# Altium PCB 智能车主板.PcbDoc
Units mm, origin at the board's own origin, x right, y up, seen from the top; angles counter-clockwise.
Board outline 100 x 80 mm, 4 copper layers (TOP01, GND02, PWR03, BOTTOM04), stack 0.603 mm thick; 92 components, 73 nets, 361 pads, 149 vias.
Unrouted connection lines stored in the file: 2.
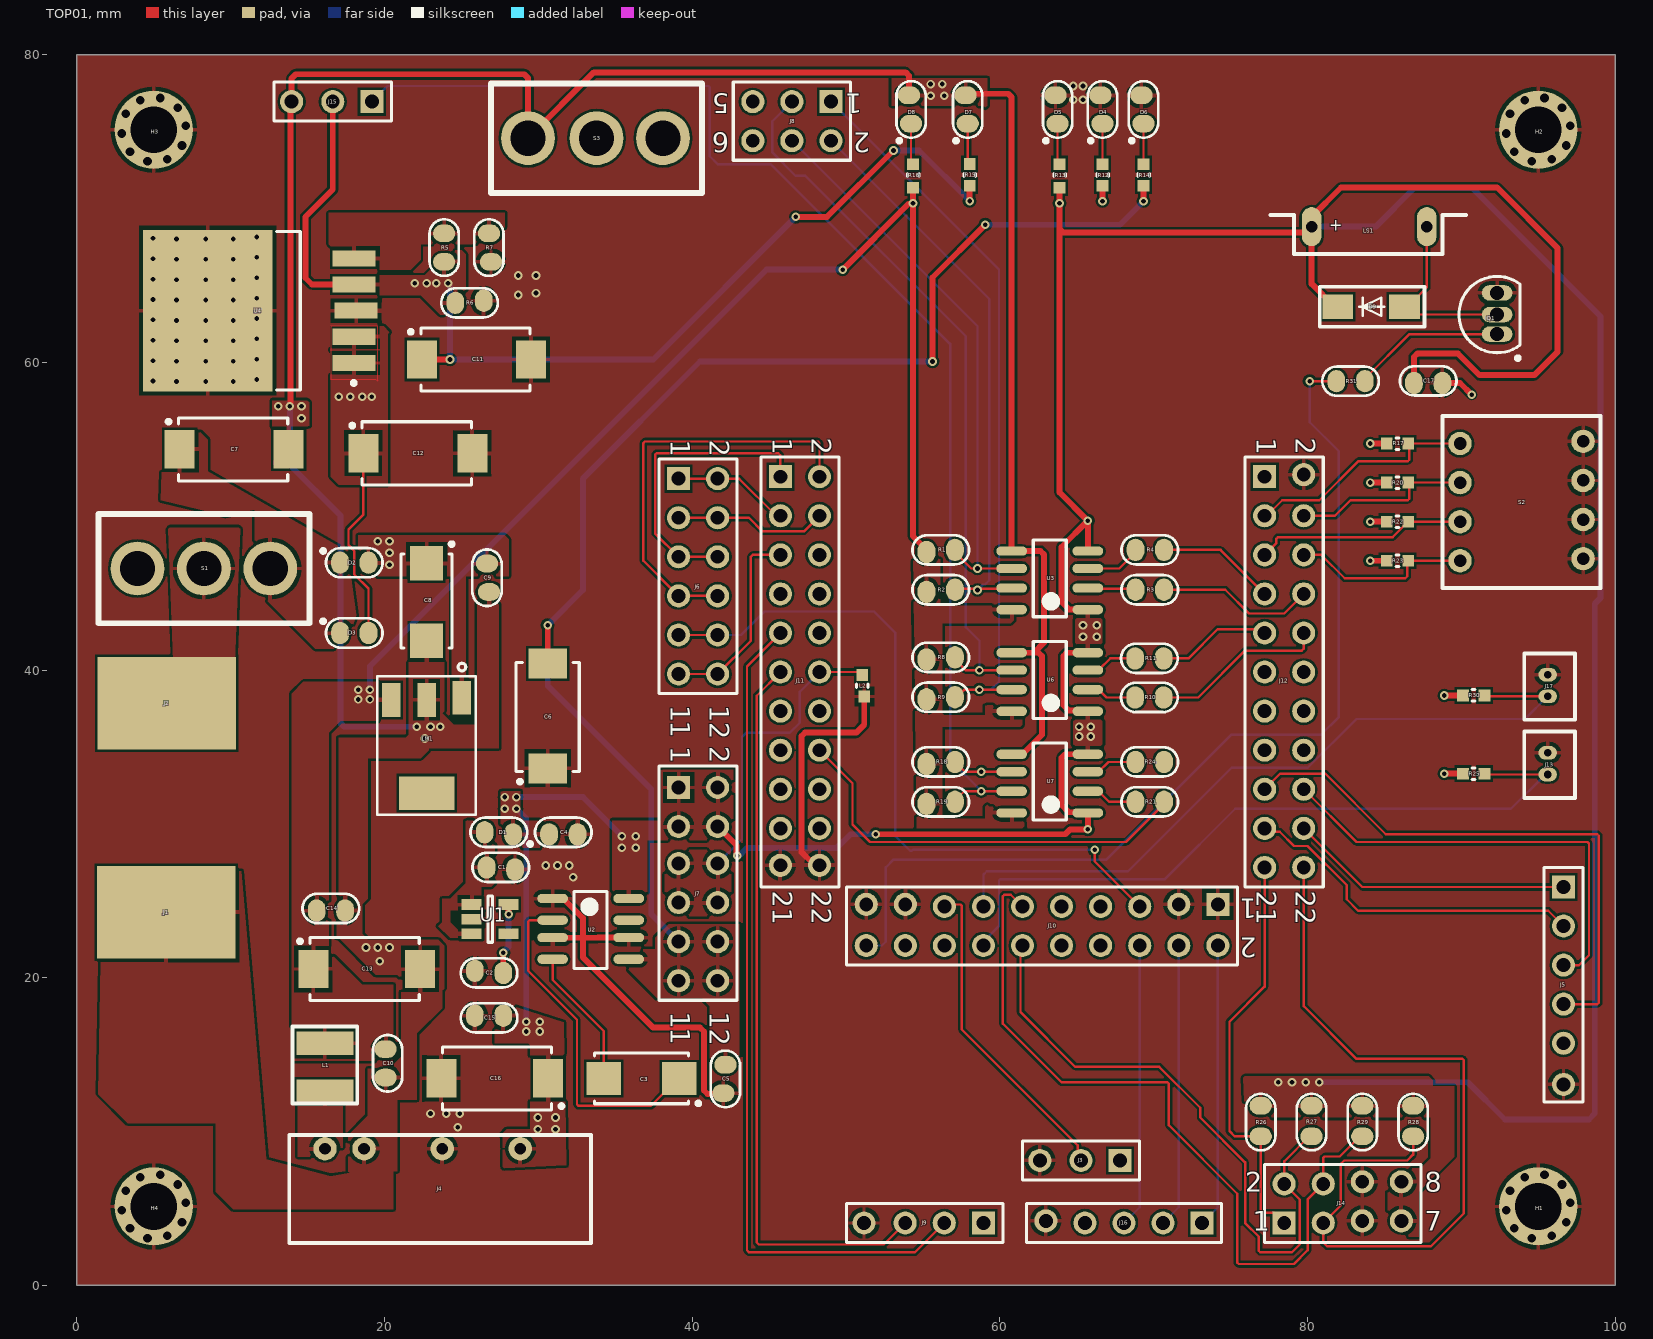
[diagram p0: TOP01 view]
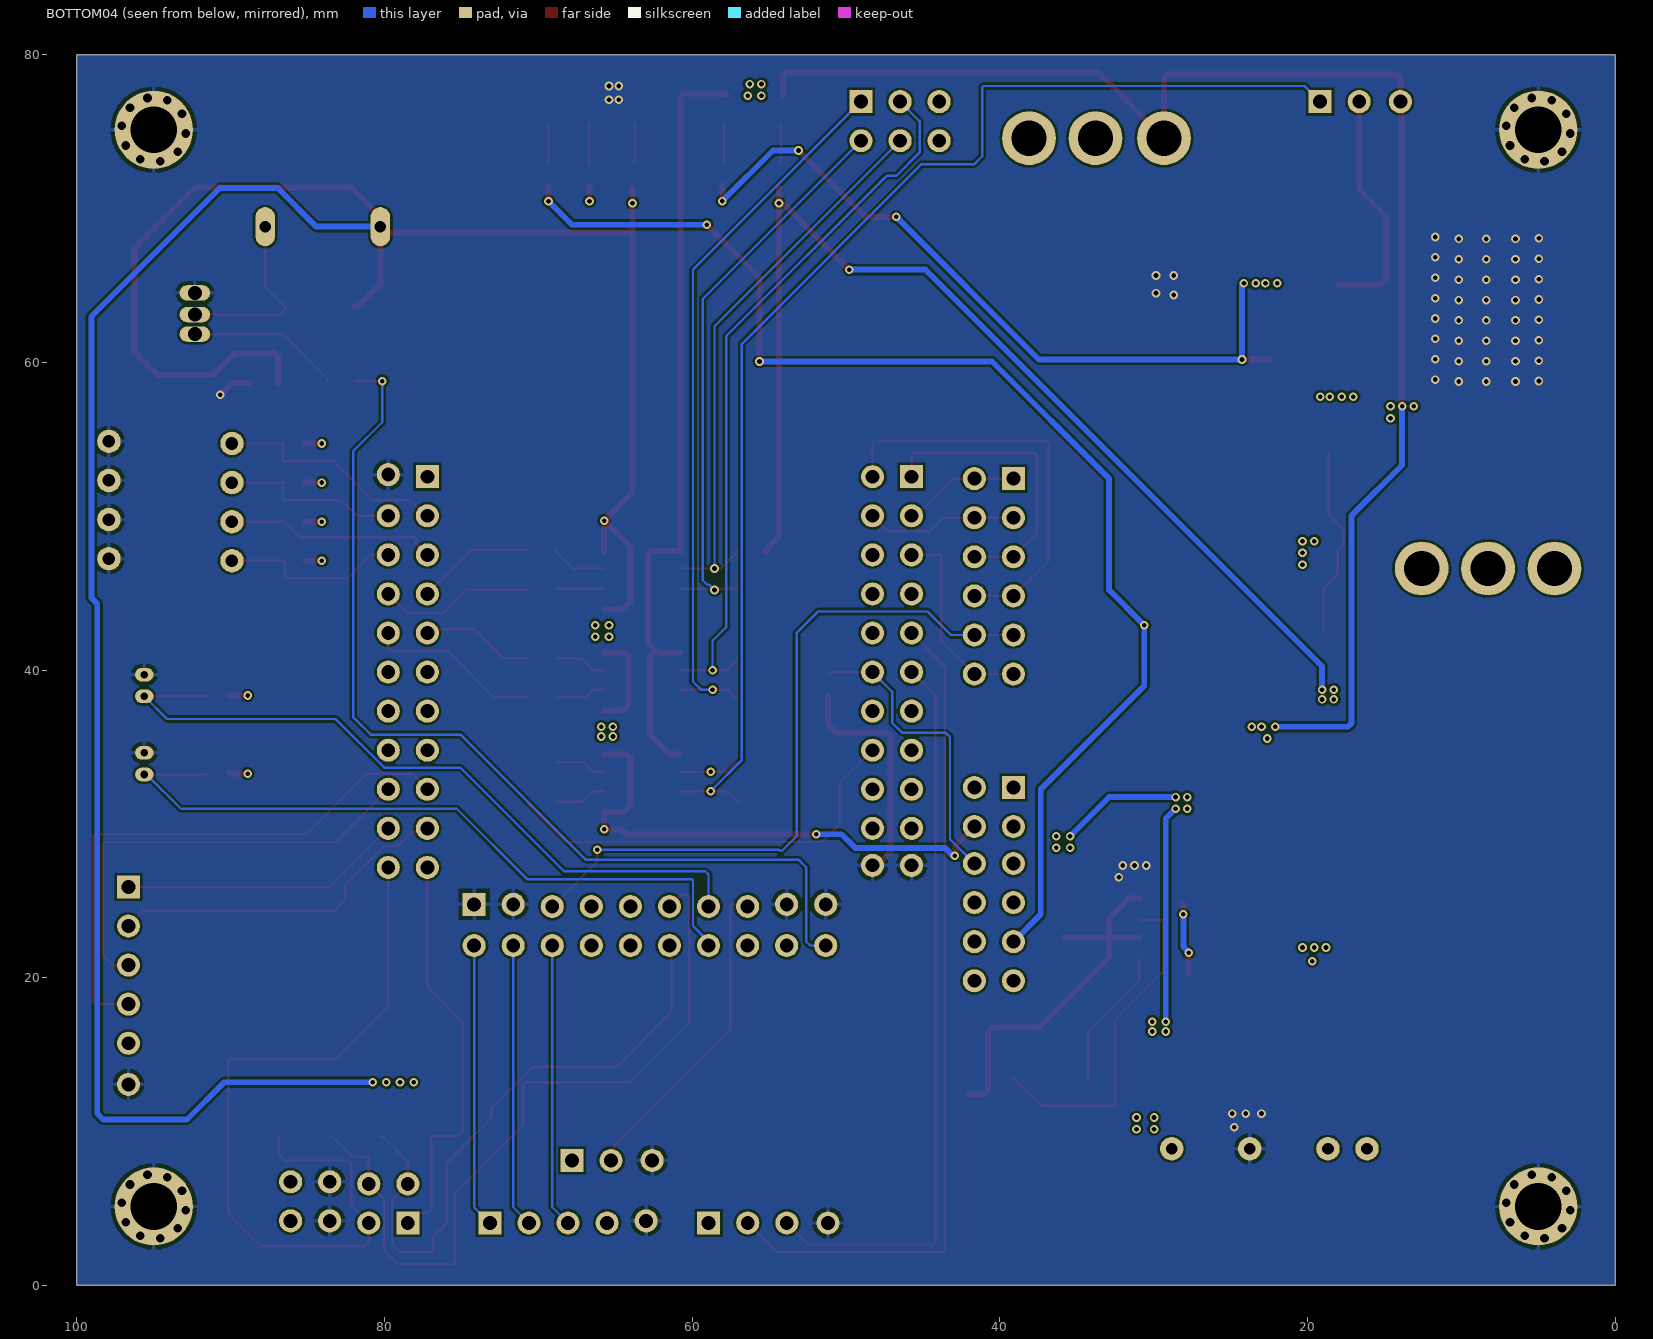
[diagram p1: BOTTOM04 view, seen from below]
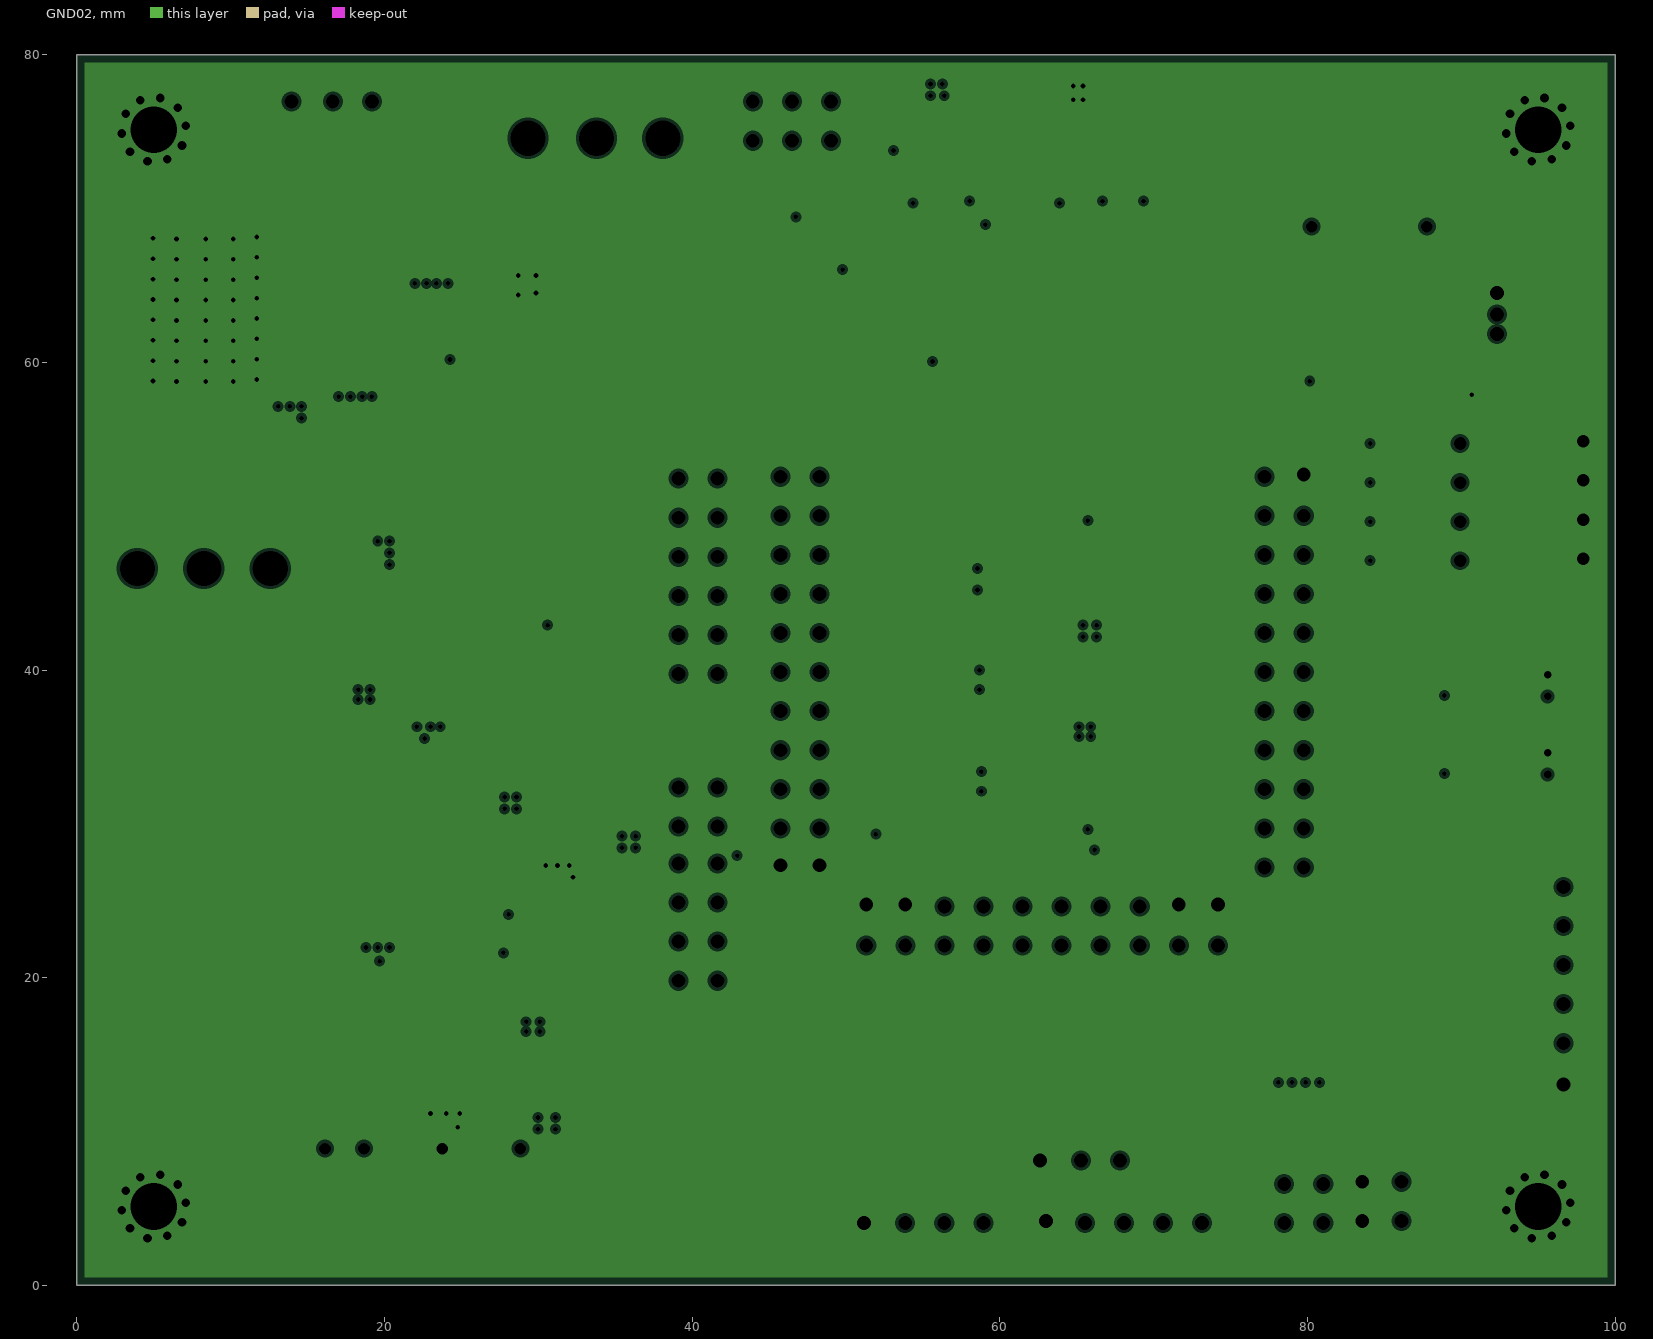
[diagram p2: GND02, clearances drawn from the general rule]
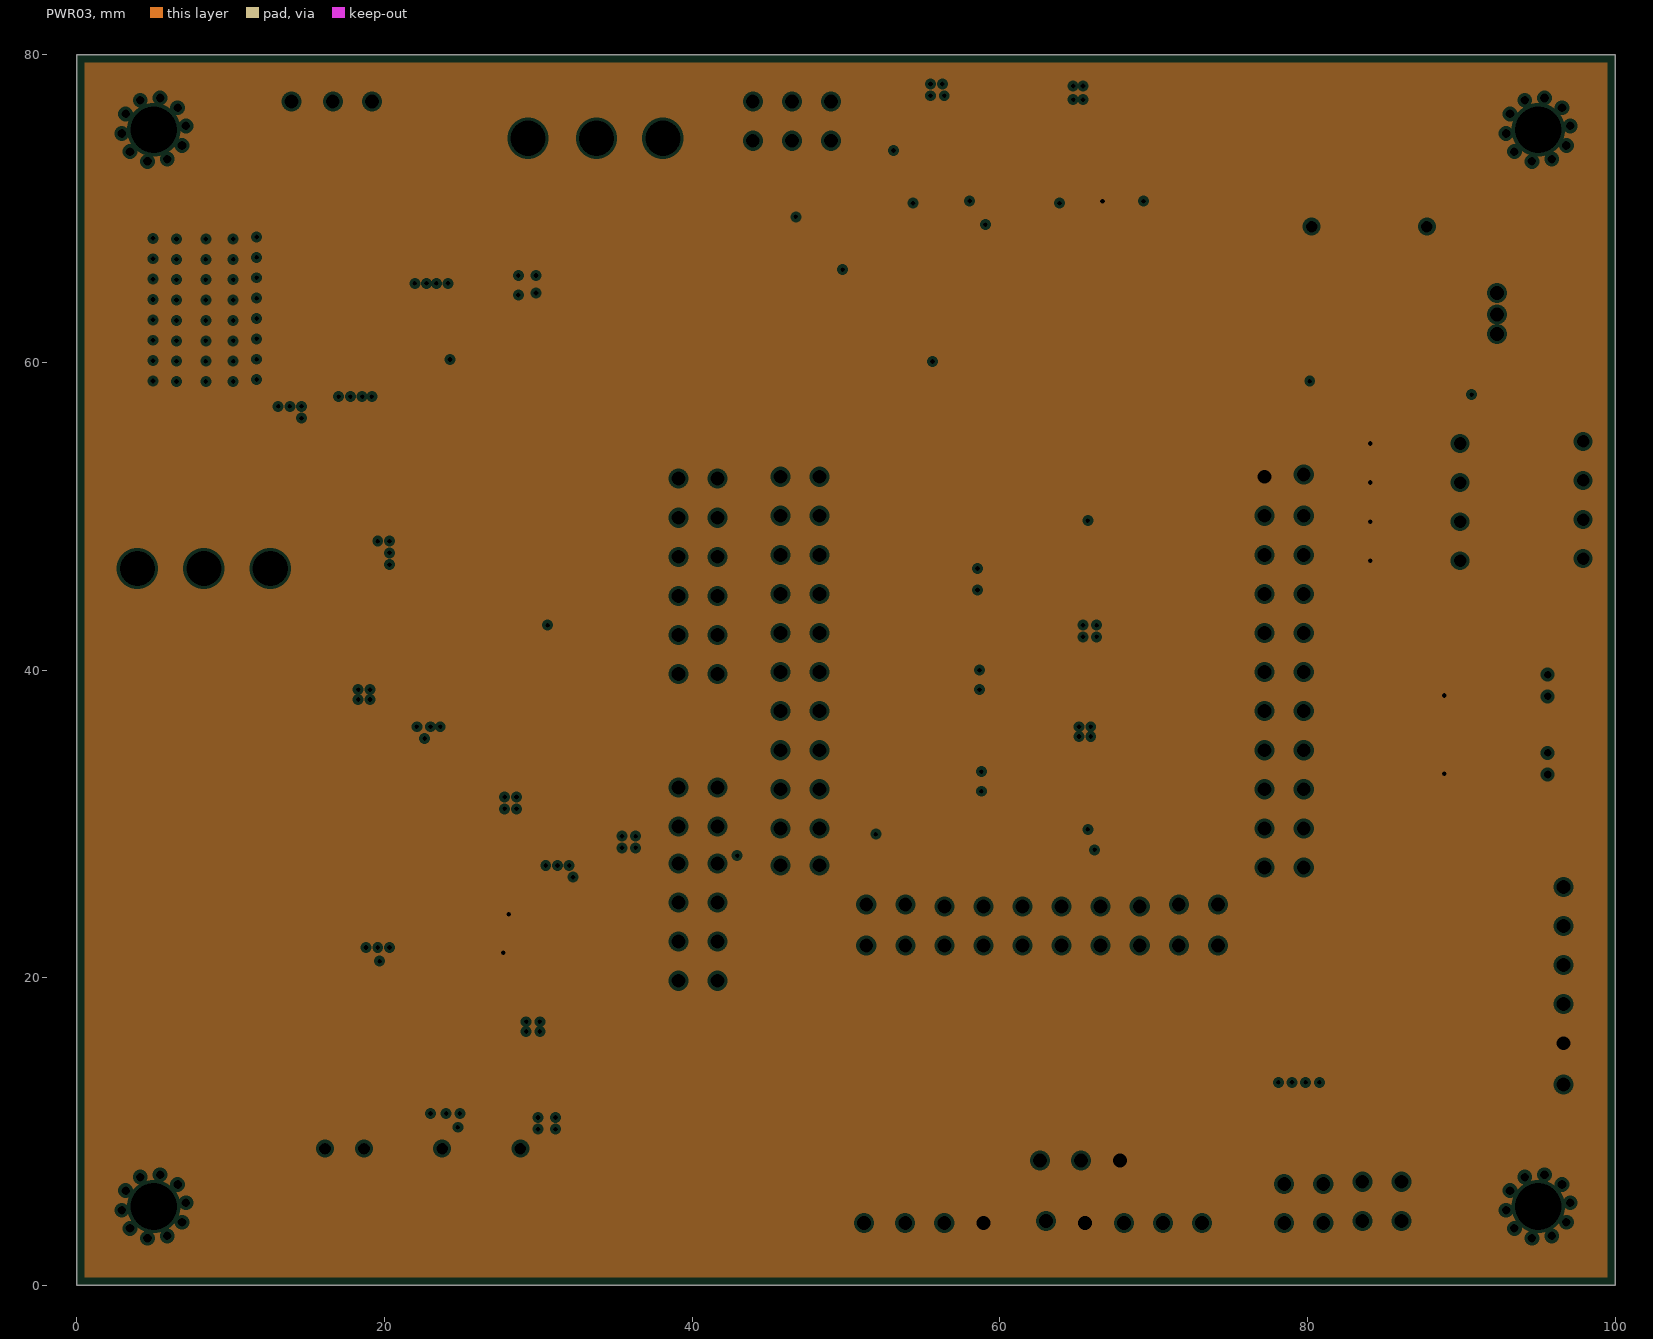
[diagram p3: PWR03, clearances drawn from the general rule]

## Layer stack, top to bottom
Top Solder: solder mask 0.0102, Solder Resist, Dk 3.5
TOP01: signal copper 0.0356
Dielectric 2: prepreg 0.0711, PP-006, Dk 4.1
GND02: plane copper 0.035, net GND
Dielectric 1: dielectric 0.32, FR-4, Dk 4.8
PWR03: plane copper 0.035, net VCC3.3
Dielectric 3: prepreg 0.0711, PP-006, Dk 4.1
BOTTOM04: signal copper 0.0356
Bottom Solder: solder mask 0.0102, Solder Resist, Dk 3.5

## Board outline
0,0 0,80 100,80 100,48.717 100,0

## Design rules (kind name [scope] priority, off if disabled: settings)
Clearance [All] p1: gap=0.152 ignorepadtopadclearanceinfootprint=FALSE
PlaneClearance [All] p1: clearance=0.203
PlaneConnect [All] p1: planeconnectstyle=Relief reliefexpansion=0.508 reliefentries=4 reliefconductorwidth=0.254 reliefairgap=0.254
PolygonConnect [All] p1: thpad.connectstyle=Relief thpad.reliefconductorwidth=0.254 thpad.reliefentries=4 thpad.polygonreliefangle="90 Angle" thpad.airgapwidth=0.254 smdpad.connectstyle=Relief smdpad.reliefconductorwidth=0.254 smdpad.reliefentries=4 smdpad.polygonreliefangle="90 Angle" smdpad.airgapwidth=0.254 via.connectstyle=Direct via.reliefconductorwidth=0.254 via.reliefentries=4 via.polygonreliefangle="90 Angle" via.airgapwidth=0.254
RoutingVias [All] p1: holewidth=0.305 width=1.27 viastyle="Through Hole" minholewidth=0.305 minwidth=1.27 maxholewidth=0.305 maxwidth=1.27
SilkToSolderMaskClearance [IsPad] p1: minsilkscreentomaskgap=0.051 clearancetoexposedcopper=TRUE
SolderMaskExpansion [All] p1: expansion=0.102 istentingtop=FALSE
Width PWR [InNetClass('PWR')] p1: maxlimit=0.381 minlimit=0.381 preferedwidth=0.381
Width [All] p2: maxlimit=0.152 minlimit=0.152 preferedwidth=0.152
27 further rules are at their usual default settings.

## Classes and differential pairs
net class PWR: GGND GND V5 V6 VBAT VBAT+ VCC3.3 VCC5 VCC-5

## Components (designator, comment, footprint, x,y, rotation, side; value= is the part's Value field where it differs from the comment)
C1 "4.7uF" 0805_Res#1 27.559,27.178 r180 top
C2 "4.7uF" 0805_Res#1 26.797,20.32 r0 top
C3 "47uF" C型钽电容_6032_28#1 36.703,13.462 r180 top
C4 "10uF" 0805_Res#2 31.623,29.464 r180 top
C5 "0.1uF" 0805_Res#1 42.164,13.426 r90 top
C6 "100uF" D型钽电容_7343_31#1 30.607,36.957 r90 top
C7 "47uF" D型钽电容_7343_31#2 10.16,54.356 r0 top
C8 "22uF" C型钽电容_6032_28#2 22.733,44.497 r270 top
C9 "0.1uF" 0805_Res#3 26.66,46.01 r270 top
C10 "4.7uF" 0805_Res#2 20.203,14.442 r90 top
C11 "22uF" D型钽电容_7343_31#2 25.908,60.198 r0 top
C12 "22uF" D型钽电容_7343_31#2 22.098,54.102 r0 top
C13 "22uF" D型钽电容_7343_31#3 18.705,20.574 r0 top
C14 "0.1uF" 0805_Res#2 16.51,24.511 r180 top
C15 "0.1uF" 0805_Res#2 26.797,17.399 r0 top
C16 "22uF" D型钽电容_7343_31#3 27.305,13.462 r180 top
C17 "104" 0805_RES 87.848,58.811 r180 top
D1 "1N5819" 0805_Dio#1 27.432,29.464 r180 top
D2 "SS34" 0805_Dio#2 18.034,46.99 r0 top
D3 "1N5819" 0805_Dio#2 18.034,42.418 r0 top
D4 "LED" 0805_Dio#3 66.675,76.454 r90 top
D5 "LED" 0805_Dio#3 63.754,76.454 r90 top
D6 "LED" 0805_Dio#3 69.342,76.454 r90 top
D7 "LED" 0805_Dio#3 57.912,76.454 r90 top
D8 "LED" 0805_Dio#3 54.229,76.454 r90 top
D9 "SS34" SS34_3D 84.201,63.627 r180 top
H1 "固定孔" 铜柱孔3 95,5 r0 top
H2 "固定孔" 铜柱孔3 95,75 r0 top
H3 "固定孔" 铜柱孔3 5,75 r0 top
H4 "固定孔" 铜柱孔3 5,5 r0 top
J1 "-" 单面焊盘2*3MM_1PIN#1 5.671,24.257 r270 top
J2 "+" 单面焊盘2*3MM_1PIN#2 5.842,37.846 r270 top
J3 "AD-KEY" HDR1X3 67.818,8.128 r180 top
J4 "CON4" B0505S-2W 22.342,8.89 r0 top
J5 "OLED" HDR1X6 96.647,25.908 r270 top
J6 "CON12" HDR2X6#1 39.116,52.451 r270 top
J7 "CON12" HDR2X6#2 39.116,32.512 r270 top
J8 "motor drive" HDR2X3 49.022,76.962 r180 top
J9 "bluetooth" HDR1X4 58.928,4.064 r180 top
J10 "HEADER 10X2" HDR2X10 74.176,24.638 r180 top
J11 "HEADER 11X2" HDR2X11#1 45.736,52.578 r270 top
J12 "HEADER 11X2" HDR2X11#2 77.216,52.578 r270 top
J13 "CON2" 2PIN杜邦插座_1.27mm 95.616,33.221 r90 top
J14 "BM" HDR2X4 78.486,4.064 r0 top
J15 "servo drive" HDR1X3 19.177,76.962 r180 top
J16 "CCD" HDR1X5 73.152,4.064 r180 top
J17 "CON2" 2PIN杜邦插座_1.27mm 95.616,38.301 r90 top
L1 "6.8uH" CDRH3D16_4.2*1.8 16.129,14.335 r180 top
L2 "100M" 0603_Res#1 51.054,38.989 r270 top
LM1 "lm2940" SOT-223 22.733,35.104 r180 top
LS1 "BELL" 蜂鸣器侧装 85.217,68.834 r0 top
Q1 "2N3904" TO-92A 92.329,63.119 r0 top
R1 "1K" 0805_Res#3 56.159,47.821 r180 top
R2 "1K" 0805_Res#3 56.159,45.23 r180 top
R3 "1K" 0805_Res#4 69.748,45.23 r180 top
R4 "1K" 0805_Res#4 69.748,47.821 r180 top
R5 "3.9K" 0805_Res#4 23.876,67.473 r90 top
R6 "1K" 0805_Res#3 25.527,63.881 r0 top
R7 "1K" 0805_Res#3 26.787,67.473 r270 top
R8 "1K" 0805_Res#3 56.159,40.836 r180 top
R9 "1K" 0805_Res#3 56.159,38.245 r180 top
R10 "1K" 0805_Res#4 69.723,38.227 r180 top
R11 "1K" 0805_Res#4 69.723,40.767 r180 top
R12 "1K" 0603_Res#2 66.675,72.198 r270 top
R13 "2.2K" 0603_Res#3 63.881,72.198 r270 top
R14 "3.3K" 0603_Res#2 69.342,72.198 r270 top
R15 "3.3K" 0603_Res#2 58.039,72.201 r270 top
R16 "3.3K" 0603_Res#3 54.356,72.198 r270 top
R17 "1K" 0603_Res#2 85.852,54.737 r180 top
R18 "1K" 0805_Res#3 56.159,34.036 r180 top
R19 "1K" 0805_Res#3 56.159,31.445 r180 top
R20 "1K" 0603_Res#2 85.852,52.197 r180 top
R21 "1K" 0805_Res#4 69.748,31.445 r180 top
R22 "1K" 0603_Res#2 85.852,49.657 r180 top
R23 "1K" 0603_Res#2 85.852,47.117 r180 top
R24 "1K" 0805_Res#4 69.748,34.036 r180 top
R25 "1K" 0603_Res#2 90.805,33.274 r0 top
R26 "1K" 0805_Res#5 76.962,10.622 r270 top
R27 "1K" 0805_Res#5 80.264,10.622 r270 top
R28 "1K" 0805_Res#5 86.868,10.622 r270 top
R29 "1K" 0805_Res#5 83.566,10.622 r270 top
R30 "1K" 0603_Res#2 90.805,38.354 r0 top
R31 "1K" 0805_Res#4 82.804,58.791 r0 top
S1 "SW-SPST" 开关#1 12.192,40.132 r270 top
S2 "SW DIP-4" 4路拨码开关 90.298,53.34 r0 top
S3 "SW-SPST" 开关#2 29.845,81.062 r90 top
U1 "TPS73633" SOT23_5-LEADS 26.867,23.815 r0 top
U2 "LM2663" SOP_8(OPA)#1 33.401,23.114 r0 top
U3 "HCPL0631" SOP_8(OPA)#2 63.246,45.974 r180 top
U4 "TPS73633" TO_263_5(10.5*8.4mm) 12.372,63.473 r0 top
U6 "HCPL0631" SOP_8(OPA)#2 63.246,39.37 r180 top
U7 "HCPL0631" SOP_8(OPA)#2 63.246,32.766 r180 top

## Footprints (in the part's own frame and the unit in brackets; to place one, negate y for a bottom-side part, rotate by r counter-clockwise, add the part's x,y. Pads: shape width x height; smd on the part's side, far side on the other; paste and mask are expansions set on the pad)
2PIN杜邦插座_1.27mm [mm]
  oval 0.9x1.2 hole 0.5: 1(0,0) 2(1.407,0)
  silkscreen extent -1.52,-1.78 2.79,1.52
4路拨码开关 [mil]
  round 60 hole 32.01: 1(-15,55) 2(-15,-45) 3(-15,-145) 4(-15,-245) 5(299.96,-239.61) 6(299.96,-139.61) 7(299.96,-39.61) 8(299.96,60.39)
  silkscreen extent -60,-315 345,125
0603_Res#1 [mil]
  rect 30x30 smd: 1(-27.56,0) 2(27.56,5.39)
  silkscreen extent -4,-15 4,15, body extent -31,-16 32,16, height 18
0603_Res#2 [mil]
  rect 30x30 smd: 1(-27.56,0) 2(27.56,0)
  silkscreen extent -4,-15 4,15, body extent -31,-16 32,16, height 18
0603_Res#3 [mil]
  rect 30x30 smd: 1(-27.56,0) 2(32.95,0)
  silkscreen extent -4,-15 4,15, body extent -31,-16 32,16, height 18
0805_Dio#1 [mm] "Chip Capacitor, 2-Leads, Body 2.0x1.3mm, IPC Medium Density"
  oval 1.15x1.45 smd: 1(-0.925,0.137) 2(0.925,0)
  silkscreen extent -2.16,-0.95 1.84,0.95, body extent -1,-0.64 1,0.64, height 0.6
0805_Dio#2 [mm] "Chip Capacitor, 2-Leads, Body 2.0x1.3mm, IPC Medium Density"
  oval 1.15x1.45 smd: 1(-0.925,0) 2(0.925,0)
  silkscreen extent -2.15,-0.95 1.84,0.95, body extent -1,-0.64 1,0.64, height 0.6
0805_Dio#3 [mm] "Chip Capacitor, 2-Leads, Body 2.0x1.3mm, IPC Medium Density"
  oval 1.15x1.45 smd: 1(-0.925,0) 2(0.925,0.137)
  silkscreen extent -2.15,-0.95 1.84,0.95, body extent -1,-0.64 1,0.64, height 0.6
0805_Res#1 [mm]
  oval 1.15x1.45 smd: 1(-0.925,0.137) 2(0.925,0)
  silkscreen extent -1.84,-0.95 1.84,0.95, body extent -1,-0.64 1,0.64, height 0.6
0805_Res#2 [mm]
  oval 1.15x1.45 smd: 1(-0.925,0.137) 2(0.925,0.137)
  silkscreen extent -1.84,-0.95 1.84,0.95, body extent -1,-0.64 1,0.64, height 0.6
0805_Res#3 [mm]
  oval 1.15x1.45 smd: 1(-0.925,0) 2(0.925,0.137)
  silkscreen extent -1.84,-0.95 1.84,0.95, body extent -1,-0.64 1,0.64, height 0.6
0805_Res#4 [mm]
  oval 1.15x1.45 smd: 1(-0.925,0) 2(0.925,0)
  silkscreen extent -1.84,-0.95 1.84,0.95, body extent -1,-0.64 1,0.64, height 0.6
0805_Res#5 [mm]
  oval 1.15x1.45 smd: 1(-1.062,0) 2(0.925,0)
  silkscreen extent -1.84,-0.95 1.84,0.95, body extent -1,-0.64 1,0.64, height 0.6
0805_RES [mm]
  oval 1.15x1.45 smd: 1(-0.925,0.137) 2(0.925,0.137)
  silkscreen extent -1.84,-0.95 1.84,0.95, body extent -1,-0.64 1,0.64, height 0.6
B0505S-2W [mil]
  round 60 hole 30: 1(-244.61,0) 2(-144.61,0) 3(55.39,0) 4(255.39,0)
  silkscreen extent -336,-241 436,35
CDRH3D16_4.2*1.8 [mm]
  rect 3.7x1.5 smd: 1(0,-1.413) 2(0,1.687)
  silkscreen extent -2.1,-2.5 2.1,2.5
C型钽电容_6032_28#1 [mm] "Molded Capacitor, 2-Leads, Body 6.0x3.2mm, IPC Medium Density"
  rect 2.25x2.15 smd: 1(-2.45,0) 2(2.45,0)
  silkscreen extent -3.83,-1.65 3.05,1.75, body extent -3,-1.6 3,1.6, height 2.5
C型钽电容_6032_28#2 [mm] "Molded Capacitor, 2-Leads, Body 6.0x3.2mm, IPC Medium Density"
  rect 2.25x2.15 smd: 1(-2.45,0) 2(2.587,0)
  silkscreen extent -3.82,-1.65 3.05,1.75, body extent -3,-1.6 3,1.6, height 2.5
D型钽电容_7343_31#1 [mm] "Molded Capacitor, 2-Leads, Body 7.3x4.3mm, IPC Medium Density"
  rect 1.95x2.5 smd: 1(-3.338,0) 2(3.475,0)
  silkscreen extent -4.32,-2.05 3.55,2.05, body extent -3.65,-2.15 3.65,2.15, height 2.8
D型钽电容_7343_31#2 [mm] "Molded Capacitor, 2-Leads, Body 7.3x4.3mm, IPC Medium Density"
  rect 1.95x2.5 smd: 1(-3.475,0) 2(3.612,0)
  silkscreen extent -4.32,-2.05 3.55,2.05, body extent -3.65,-2.15 3.65,2.15, height 2.8
D型钽电容_7343_31#3 [mm] "Molded Capacitor, 2-Leads, Body 7.3x4.3mm, IPC Medium Density"
  rect 1.95x2.5 smd: 1(-3.338,0) 2(3.612,0)
  silkscreen extent -4.32,-2.05 3.55,2.05, body extent -3.65,-2.15 3.65,2.15, height 2.8
HDR1X3 [mm] "Connector; Header; 3 Position"
  rect 1.5x1.5 hole 0.9: 1(0,0)
  round 1.5 hole 0.9: 2(2.54,0) 3(5.217,0)
  silkscreen extent -1.27,-1.27 6.35,1.27
HDR1X4 [mm] "Connector; Header; 4 Position"
  rect 1.5x1.5 hole 0.9: 1(0,0)
  round 1.5 hole 0.9: 2(2.54,0) 3(5.08,0) 4(7.757,0)
  silkscreen extent -1.27,-1.27 8.89,1.27
HDR1X5 [mm] "Connector; Header; 5 Position"
  rect 1.5x1.5 hole 0.9: 1(0,0)
  round 1.5 hole 0.9: 2(2.54,0) 3(5.08,0) 4(7.62,0) 5(10.16,-0.137)
  silkscreen extent -1.27,-1.27 11.43,1.27
HDR1X6 [mm] "Connector; Header; 6 Position"
  rect 1.5x1.5 hole 0.9: 1(0,0)
  round 1.5 hole 0.9: 2(2.54,0) 3(5.08,0) 4(7.62,0) 5(10.16,0) 6(12.837,0)
  silkscreen extent -1.27,-1.27 13.97,1.27
HDR2X3 [mm] "Connector; Header; 3x2 Position"
  rect 1.5x1.5 hole 0.9: 1(0,0)
  round 1.5 hole 0.9: 2(0,2.54) 3(2.54,0) 4(2.54,2.54) 5(5.08,0) 6(5.08,2.54)
  silkscreen extent -1.27,-1.27 6.35,3.81
HDR2X4 [mm] "Connector; Header; 4x2 Position"
  rect 1.5x1.5 hole 0.9: 1(0,0)
  round 1.5 hole 0.9: 2(0,2.54) 3(2.54,0) 4(2.54,2.54) 5(5.08,0.137) 6(5.08,2.677) 7(7.62,0.137) 8(7.62,2.677)
  silkscreen extent -1.27,-1.27 8.89,3.81
HDR2X6#1 [mm] "Connector; Header; 6x2 Position"
  rect 1.5x1.5 hole 0.9: 1(0,0)
  round 1.5 hole 0.9: 2(0,2.54) 3(2.54,0) 4(2.54,2.54) 5(5.08,0) 6(5.08,2.54) 7(7.62,0) 8(7.62,2.54) 9(10.16,0) 10(10.16,2.54) 11(12.7,0) 12(12.7,2.54)
  silkscreen extent -1.27,-1.27 13.97,3.81
HDR2X6#2 [mm] "Connector; Header; 6x2 Position"
  rect 1.5x1.5 hole 0.9: 1(0.137,0)
  round 1.5 hole 0.9: 2(0.137,2.54) 3(2.677,0) 4(2.677,2.54) 5(5.08,0) 6(5.08,2.54) 7(7.62,0) 8(7.62,2.54) 9(10.16,0) 10(10.16,2.54) 11(12.7,0) 12(12.7,2.54)
  silkscreen extent -1.27,-1.27 13.97,3.81
HDR2X10 [mm] "Connector; Header; 10x2 Position"
  rect 1.5x1.5 hole 0.9: 1(0,-0.137)
  round 1.5 hole 0.9: 2(0,2.54) 3(2.54,-0.137) 4(2.54,2.54) 5(5.08,0) 6(5.08,2.54) 7(7.62,0) 8(7.62,2.54) 9(10.16,0) 10(10.16,2.54) 11(12.7,0) 12(12.7,2.54) 13(15.24,0) 14(15.24,2.54) 15(17.78,0) 16(17.78,2.54) 17(20.32,-0.137) 18(20.32,2.54) 19(22.86,-0.137) 20(22.86,2.54)
  silkscreen extent -1.27,-1.27 24.13,3.81
HDR2X11#1 [mm] "Connector; Header; 11x2 Position"
  rect 1.5x1.5 hole 0.9: 1(0,0)
  round 1.5 hole 0.9: 2(0,2.54) 3(2.54,0) 4(2.54,2.54) 5(5.08,0) 6(5.08,2.54) 7(7.62,0) 8(7.62,2.54) 9(10.16,0) 10(10.16,2.54) 11(12.7,0) 12(12.7,2.54) 13(15.24,0) 14(15.24,2.54) 15(17.78,0) 16(17.78,2.54) 17(20.32,0) 18(20.32,2.54) 19(22.86,0) 20(22.86,2.54) 21(25.263,0) 22(25.263,2.54)
  silkscreen extent -1.27,-1.27 26.67,3.81
HDR2X11#2 [mm] "Connector; Header; 11x2 Position"
  rect 1.5x1.5 hole 0.9: 1(0,0)
  round 1.5 hole 0.9: 2(-0.137,2.54) 3(2.54,0) 4(2.54,2.54) 5(5.08,0) 6(5.08,2.54) 7(7.62,0) 8(7.62,2.54) 9(10.16,0) 10(10.16,2.54) 11(12.7,0) 12(12.7,2.54) 13(15.24,0) 14(15.24,2.54) 15(17.78,0) 16(17.78,2.54) 17(20.32,0) 18(20.32,2.54) 19(22.86,0) 20(22.86,2.54) 21(25.4,0) 22(25.4,2.54)
  silkscreen extent -1.27,-1.27 26.67,3.81
SOP_8(OPA)#1 [mm] "SOIC, 8-Leads, Body 5.0x4.0mm (max), Pitch 1.27mm, IPC Medium Density"
  oval 2x0.6 smd: 1(-2.475,2.042) 2(-2.475,0.635) 3(-2.475,-0.498) 4(-2.475,-1.905) 5(2.475,-1.905) 6(2.475,-0.498) 7(2.475,0.635) 8(2.475,2.042)
  silkscreen extent -1.07,-2.5 1.08,2.5, body extent -2,-2.5 2,2.5, height 1.75
SOP_8(OPA)#2 [mm] "SOIC, 8-Leads, Body 5.0x4.0mm (max), Pitch 1.27mm, IPC Medium Density"
  oval 2x0.6 smd: 1(-2.475,2.042) 2(-2.475,0.635) 3(-2.475,-0.635) 4(-2.475,-1.768) 5(2.475,-1.768) 6(2.475,-0.635) 7(2.475,0.635) 8(2.475,2.042)
  silkscreen extent -1.07,-2.5 1.08,2.5, body extent -2,-2.5 2,2.5, height 1.75
SOT23_5-LEADS [mm] "SOT23, 5-Leads, Body 3.0x3.0mm (max), Pitch 0.95mm, IPC Low Density"
  rect 1.3x0.7 smd: 1(-1.2,0.95) 2(-1.2,0) 3(-1.2,-0.95) 4(1.2,-0.95) 5(1.2,0.95)
  silkscreen extent -0.15,-1.5 0.15,1.5, body extent -0.85,-1.52 0.85,1.53, height 1.45
SOT-223 [mm]
  rect 1.2x2.2 smd: 1(-2.3,-3.1) 2(0,-2.963) 3(2.3,-2.963)
  rect 3.6x2.2 smd: 4(0,3.1)
  silkscreen extent -3.2,-5.35 3.2,4.5
SS34_3D [mm]
  rect 2x1.6 smd: 1(-2.1,0) 2(2.237,0)
  silkscreen extent -3.4,-1.3 3.4,1.3, body extent -2.46,-1.36 2.54,1.34, height 2.15
TO-92A [mm] "TO, Flat Index; 3 In-Line, Axial Leads; Body Dia. 4.5mm; Leads 0.51 x 0.48 mm (max)"
  oval 2x1 hole 0.9: 1(0,-1.27) 2(0,0) 3(0,1.407)
  silkscreen extent -2.48,-2.95 1.5,2.48, body extent -2.48,-2.5 1.5,2.5, height 6.86
TO_263_5(10.5*8.4mm) [mm] "D2-PAK, 6-Pads, Body 8.8x10.3mm (max), IPC Medium Density"
  rect 2.8x1.05 smd: 1(5.65,-3.5) 2(5.65,-1.8) 3(5.787,-0.1) 4(5.65,1.6) 5(5.65,3.3)
  rect 8.4x10.5 smd: 3(-3.863,-0.1)
  silkscreen extent 0.6,-5.25 5.75,5.05, body extent -8.63,-5.1 7.03,4.9
单面焊盘2*3MM_1PIN#1 [mm]
  rect 6x9 smd: 1(0,0.137)
单面焊盘2*3MM_1PIN#2 [mm]
  rect 6x9 smd: 1(0,0)
开关#1 [mil]
  round 137.8 hole 90: 1(-255,15) 2(-255,-155) 3(-255,-325)
  silkscreen extent -395,-425 -115,115
开关#2 [mil]
  round 137.8 hole 90: 1(-255,20.39) 2(-255,-155) 3(-255,-325)
  silkscreen extent -395,-425 -115,115
蜂鸣器侧装 [mil]
  oval 50x100 hole 30: 1(-194.61,0) 2(100,0)
  silkscreen extent -300,-70 200,30
铜柱孔3 [mil]
  round 23 hole 22: 11(-82.21,-4.27) 11(-72.19,45.9) 11(-60.83,-50.75) 11(-34.6,80.59) 11(-16.21,-75.78) 11(16.21,86.57) 11(34.6,-69.81) 11(60.83,61.54) 11(72.19,-35.11) 11(82.21,15.06)
  round 200 hole 120: 11(0,5.39)

## Part data
C1 C2 C4 C5 C9 C10 C14 C15 C17: library part CAP, "电容"
C3 C6 C7 C8 C11 C12 C13 C16: library part 极性电容, "极性电容"
D1 D3: library part SS34, "二极管"
D2 D9: "二极管"
D4 D5 D6 D7 D8: "LED灯"
J1 J2: library part CON1, "排针"
J3 J15: library part CON3, "排针"
J4 J6 J7 J10 J11 J12 J13 J17: "排针"
J5 J8: library part CON6, "排针"
J9: library part CON4, "排针"
J14: library part CON8, "排针"
J16: library part CON5, "排针"
L1: library part INDUCTOR, "电感"
L2: library part INDUCTOR_2, "电感"
LM1 U1 U2: "IC"
LS1: "喇叭"
Q1: "三极管"
R1 R2 R3 R4 R5 R6 R7 R8 R9 R10 R11 R12 R13 R14 R15 R16 R17 R18 R19 R20 R21 R22 R23 R24 R25 R26 R27 R28 R29 R30 R31: library part RES, "电阻"
S1 S3: "开关"
S2: "拨码开关"
U3 U6 U7: "光耦"
U4: library part MIC29302, "IC"

## Via types
v1: diameter 0.559, hole 0.305, TOP01 to BOTTOM04, tented both sides, 141 vias
v2: diameter 0.559, hole 0.305, TOP01 to BOTTOM04, 8 vias

## Nets (pads, with @x,y where several pads share a name; then routed paths per layer and width w, separated by ;. In a path a pad name is that pad's centre, name@x,y a point inside that pad or via, vN(x,y) a via of type N, cw(c..) or ccw(c..) an arc to the next point about the centre after c; other vN are vias at no path point)
A1: J11.7
ADB2: J6.9 J6.10 J10.5 | length 46.8
  TOP01 w0.152: J6.9 J6.10 ; v1(66.167,28.321) 66.167,27.567 J10.5
  BOTTOM04 w0.152: J6.10 43.18,42.291 44.704,43.815 51.816,43.815 53.213,42.418 53.213,29.21 54.166,28.257 54.292,28.257 54.356,28.321 v1(66.167,28.321)
ADE20: J6.1 J6.2 J11.3 | length 7.6
  TOP01 w0.152: J6.1 J6.2 43.053,52.451 45.466,50.038 J11.3
ADE21: J6.3 J6.4 J11.4 | length 9.9
  TOP01 w0.152: J6.3 J6.4 43.688,49.911 44.577,49.022 47.26,49.022 J11.4
ADE22: J6.5 J6.6 J11.1 | length 19.4
  TOP01 w0.152: J6.6 J6.5 37.592,48.895 37.592,54.013 37.681,54.102 45.593,54.102 45.736,53.959 J11.1
ADE23: J6.7 J6.8 J11.2 | length 27.1
  TOP01 w0.152: J6.8 J6.7 36.83,47.117 36.83,54.775 36.919,54.864 48.171,54.864 48.276,54.759 J11.2
ADE29: J11.6
ADE30: J6.11 J6.12 J11.5 | length 13
  TOP01 w0.152: J6.11 J6.12 43.815,41.91 43.815,47.371 43.942,47.498 J11.5
AGND: J7.5 J7.6 J7.7 J7.8 J11.12 L2.1 | length 19.7
  TOP01 w0.152: J11.12 50.865,39.878 L2.1
  BOTTOM04 w0.152: J7.6 43.238,29.014 43.238,35.655 43.523,35.941 46.355,35.941 46.99,36.576 46.99,38.592 J11.12
B16: J10.11 J14.4 R29.2 | length 50.3
  TOP01 w0.152: J10.11 60.714,25.4 60.287,25.4 60.198,25.311 60.198,17.018 64.008,13.208 70.904,13.208 70.993,13.119 70.993,10.414 75.438,5.969 75.438,1.486 75.527,1.397 79.121,1.397 80.01,2.286 80.01,5.588 J14.4 81.026,8.293 81.115,8.382 82.101,8.382 83.416,9.697 R29.2
B17: J10.12 J14.2 R27.2 | length 40.7
  TOP01 w0.152: J10.12 61.341,21.963 61.341,17.78 64.897,14.224 70.358,14.224 73.025,11.557 73.025,10.922 75.946,8.001 75.946,4.064 76.835,3.175 76.835,2.248 76.924,2.159 78.994,2.159 79.502,2.667 79.502,5.588 J14.2 78.486,8.069 80.114,9.697 R27.2
C0: J3.2 J10.15 | length 21
  TOP01 w0.152: J10.15 56.523,24.765 57.442,24.765 57.531,24.676 57.531,16.637 65.061,9.107 65.061,8.345 J3.2
C1: J10.16
C2: J10.18
C3: J10.20 R31.1 | length 64.1
  TOP01 w0.152: v2(80.147,58.791) R31.1
  BOTTOM04 w0.152: J10.20 52.324,22.098 52.578,22.352 52.578,27.178 53.086,27.686 66.929,27.686 75.057,35.814 80.899,35.814 82.042,36.957 82.042,54.229 80.147,56.124 v2(80.147,58.791)
C4: J12.22 J14.3 R28.2 | length 52.7
  TOP01 w0.152: J12.22 79.756,18.161 83.185,14.732 90.081,14.732 90.17,14.643 90.17,4.699 88.011,2.54 81.28,2.54 81.026,2.794 J14.3 82.169,5.207 82.169,7.912 82.385,8.128 86.487,8.128 86.868,8.509 R28.2
C5: J12.21 J14.1 R26.2 | length 26.9
  TOP01 w0.152: J12.21 77.216,19.431 74.93,17.145 74.93,10.033 75.266,9.697 R26.2 76.962,4.915 77.139,4.738 77.812,4.738 J14.1
C6: J5.1 J12.20 | length 18.5
  TOP01 w0.152: J12.20 83.566,25.908 J5.1
C7: J5.2 J12.19 | length 22.6
  TOP01 w0.152: J12.19 77.433,29.501 78.195,29.501 79.121,28.575 80.01,28.575 82.55,26.035 82.55,25.108 83.291,24.367 95.648,24.367 J5.2
C8: J5.3 J12.18 | length 29.2
  TOP01 w0.152: J12.18 83.185,28.829 98.209,28.829 98.298,28.74 98.298,21.463 97.648,20.813 96.662,20.813 J5.3
C9: J5.4 J12.17 | length 37
  TOP01 w0.152: J12.17 78.232,33.274 81.153,33.274 85.09,29.337 98.844,29.337 98.933,29.248 98.933,18.377 98.844,18.288 J5.4
CCDB0: J10.2 J16.1 | length 18.5
  BOTTOM04 w0.152: J16.1 74.176,5.088 J10.2
CCDB1: J10.4 J16.2 | length 18.5
  BOTTOM04 w0.152: J16.2 71.636,5.088 J10.4
CCDB3: J10.6 J16.3 | length 18.5
  BOTTOM04 w0.152: J16.3 69.096,5.088 J10.6
D4: J12.6 R23.1 S2.4 | length 11.8
  TOP01 w0.152: J12.6 80.899,47.498 82.423,45.974 86.36,45.974 86.487,46.101 86.487,47.052 R23.1 S2.4
D5: J12.5 R22.1 S2.3 | length 13.8
  TOP01 w0.152: J12.5 77.978,48.26 77.978,48.552 78.067,48.641 85.536,48.641 R22.1 S2.3
D6: J12.4 R20.1 S2.2 | length 11.8
  TOP01 w0.152: J12.4 81.788,50.038 82.804,51.054 86.525,51.054 86.614,51.143 86.614,52.135 R20.1 S2.2
D7: J12.3 R17.1 S2.1 | length 15.4
  TOP01 w0.152: J12.3 77.343,50.038 78.359,51.054 80.772,51.054 83.312,53.594 86.525,53.594 86.614,53.683 86.614,54.675 R17.1 S2.1
GGND: C7.2 C8.2 C9.2 C10.1 C13.2 C14.1 D7.2 D8.2 J1.1 J4.2 J15.3 LM1.2 S3.1 U3.5 U6.5 U7.5 | length 146.9
  TOP01 w0.381: v1(13.843,57.15) 13.877,57.184 13.877,76.879 J15.3 13.96,78.476 14.224,78.74 29.083,78.74 29.337,78.486 S3.1@29.337,74.595 ; S3.1 S3.1@29.337,74.595 ; D8.2 54.102,77.389 54.102,78.644 53.879,78.867 33.609,78.867 S3.1@29.337,74.595 ; D7.2 57.866,77.47 60.548,77.47 60.771,77.247 U3.5 60.781,47.752 62.642,47.752 62.865,47.529 62.865,41.783 62.22,41.138 ; U7.5 61.471,34.534 62.738,35.801 62.738,40.915 62.515,41.138 62.22,41.138 ; U6.5 62.22,41.138
  BOTTOM04 w0.381: v1(13.843,57.15) 13.843,53.34 17.145,50.038 17.145,36.545 17.368,36.322 v1(22.098,36.322)
  other v1: 19.685,21.082 18.796,21.971 19.558,21.971 20.32,21.971 22.606,35.56 22.987,36.322 23.622,36.322 14.605,56.388 13.081,57.15 14.605,57.15 55.499,77.343 56.388,77.343 55.499,78.105 56.261,78.105
GHGL: J10.13 J17.1 R30.2 | length 47.7
  TOP01 w0.152: R30.2 91.558,38.301 J17.1
  BOTTOM04 w0.152: J10.13 58.936,26.716 59.144,26.924 68.326,26.924 75.057,33.655 80.01,33.655 83.185,36.83 94.145,36.83 J17.1
GHGR: J10.14 J13.1 R25.2 | length 47.3
  TOP01 w0.152: R25.2 91.558,33.221 J13.1
  BOTTOM04 w0.152: J10.14 58.936,22.36 59.944,23.368 59.944,26.327 60.033,26.416 70.739,26.416 75.311,30.988 93.233,30.988 95.466,33.221 J13.1
GND: C1.1 C2.1 C4.1 C5.1 C6.1 C11.2 C12.2 C15.1 C16.2 C17.1 D4.2 D5.2 D6.2 H1.11 H2.11 H3.11 H4.11 J3.3 J4.3 J5.6 J9.4 J10.1 J10.3 J10.17 J10.19 J11.21 J11.22 J12.2 J13.2 J14.5 J14.6 J16.5 J17.2 L2.2 Q1.3 R6.2 R7.2 S2.5 S2.6 S2.7 S2.8 U1.2 U2.1 U2.3 U2.6 U4.3 | length 42.6
  TOP01 w0.381: U2.3 30.936,22.606 32.893,22.606 ; U2.1 31.626,25.156 32.893,23.889 32.893,22.606 ; U2.6 33.877,22.616 33.867,22.606 32.893,22.606 ; C5.1 41.972,12.446 40.99,12.446 40.767,12.669 40.767,16.51 40.513,16.764 37.465,16.764 32.893,21.336 32.893,22.606 ; J11.22 47.973,27.315 47.394,27.894 47.386,27.894 47.117,28.163 47.117,35.718 47.34,35.941 50.673,35.941 51.191,36.459 L2.2 ; C17.1 89.916,58.674 v2(90.678,57.912)
  other v1: 24.765,10.287 22.987,11.176 24.003,11.176 24.892,11.176 32.258,26.543 30.48,27.305 31.242,27.305 32.004,27.305 6.477,58.765 8.382,58.765 10.16,58.765 4.953,58.801 11.684,58.892 6.477,60.089 8.382,60.089 10.16,60.089 4.953,60.125 11.684,60.216 6.477,61.414 8.382,61.414 10.16,61.414 4.953,61.45 11.684,61.541 6.477,62.738 8.382,62.738 10.16,62.738 4.953,62.774 11.684,62.865 6.477,64.062 8.382,64.062 10.16,64.062 4.953,64.099 11.684,64.189 28.702,64.389 29.845,64.516 6.477,65.387 8.382,65.387 10.16,65.387 4.953,65.423 11.684,65.514 28.702,65.659 29.845,65.659 6.477,66.711 8.382,66.711 10.16,66.711 4.953,66.748 11.684,66.838 6.477,68.036 8.382,68.036 10.16,68.036 4.953,68.072 11.684,68.163 64.77,77.089 65.405,77.089 64.77,77.978 65.405,77.978
LPWM1: J8.1 R9.1 U6.7 | length 47.6
  TOP01 w0.152: R9.1 57.204,38.245 57.694,38.735 v1(58.674,38.735) U6.7
  BOTTOM04 w0.152: J8.1 59.944,66.04 59.944,39.243 59.436,38.735 v1(58.674,38.735)
LPWM2: J8.3 R8.1 U6.6 | length 47.5
  TOP01 w0.152: R8.1 57.084,40.686 57.766,40.005 v1(58.674,40.005) U6.6
  BOTTOM04 w0.152: J8.3 45.212,75.692 45.212,73.66 46.736,72.136 47.371,72.136 57.785,61.722 57.785,42.799 58.674,41.91 v1(58.674,40.005)
"motor L+": J12.10 R10.1 | length 11.4
  TOP01 w0.152: R10.1 72.898,38.227 75.946,41.275 79.629,41.275 79.756,41.402 J12.10
"motor L-": J12.9 R11.1 | length 7.5
  TOP01 w0.152: R11.1 72.263,40.767 74.168,42.672 76.962,42.672 J12.9
"motor R+": J12.8 R3.1 | length 10.2
  TOP01 w0.152: R3.1 74.658,45.23 76.2,43.688 78.486,43.688 J12.8
"motor R-": J12.7 R4.1 | length 7.7
  TOP01 w0.152: R4.1 74.353,47.821 J12.7
NetC1_2: C1.2 D1.2 U1.1 U1.3
NetC3_1: C3.1 U2.2 | length 22.2
  TOP01 w0.152: U2.2 29.426,23.749 29.337,23.66 29.337,20.447 32.512,17.272 32.512,11.773 32.601,11.684 37.325,11.684 39.103,13.462 C3.1
NetC3_2: C3.2 U2.4 | length 9.1
  TOP01 w0.152: U2.4 30.926,19.874 34.253,16.547 C3.2
NetC8_1: C8.1 C9.1 D2.2 LM1.1
  other v1: 20.32,46.863 20.32,47.625 19.558,48.387 20.32,48.387
NetC12_1: C12.1 D3.2 U4.1 U4.2 | length 12.6
  TOP01 w0.152: C12.1 18.623,50.119 17.653,49.149 17.653,48.133 18.034,47.752 18.034,46.228 18.959,45.303 D3.2
  other v1: 17.018,57.785 17.78,57.785 18.542,57.785 19.177,57.785
NetD4_1: D4.1 R12.1 | length 2.6
  TOP01 w0.152: R12.1 D4.1
NetD5_1: D5.1 R13.1 | length 2.7
  TOP01 w0.152: D5.1 63.754,73.025 R13.1
NetD6_1: D6.1 R14.1 | length 2.6
  TOP01 w0.152: R14.1 D6.1
NetD7_1: D7.1 R15.1 | length 2.7
  TOP01 w0.152: D7.1 57.912,73.028 R15.1
NetD8_1: D8.1 R16.1 | length 2.7
  TOP01 w0.152: D8.1 54.229,73.025 R16.1
NetD9_1: D9.1 LS1.2 Q1.2 | length 12.4
  TOP01 w0.152: LS1.2@87.587,68.664 LS1.2 87.757,64.883 86.501,63.627 D9.1 86.809,63.119 Q1.2
NetJ4_1: J4.1 L1.2
NetJ8_5: J8.5 J8.6 S3.2
NetQ1_1: Q1.1 R31.2 | length 10.1
  TOP01 w0.152: R31.2 83.729,58.941 86.637,61.849 Q1.1 Q1.1@92.456,61.976
NetR3_2: R3.2 U3.2 | length 3.1
  TOP01 w0.152: U3.2 65.775,45.285 68.769,45.285 R3.2
NetR4_2: R4.2 U3.3 | length 3.7
  TOP01 w0.152: U3.3 67.761,46.609 68.823,47.671 R4.2
NetR5_2: R5.2 R7.1 U4.5
NetR10_2: R10.2 U6.2 | length 3.3
  TOP01 w0.152: U6.2 66.421,38.735 66.929,38.227 R10.2
NetR11_2: R11.2 U6.3 | length 3.4
  TOP01 w0.152: U6.3 66.421,40.005 67.183,40.767 R11.2
NetR18_1: R18.1 U7.6 | length 3.9
  TOP01 w0.152: R18.1 57.101,34.036 57.736,33.401 U7.6
  other v1: 58.801,33.401
NetR21_2: R21.2 U7.2 | length 3.4
  TOP01 w0.152: U7.2 66.421,32.131 67.107,31.445 R21.2
NetR24_2: R24.2 U7.3 | length 3.4
  TOP01 w0.152: U7.3 66.421,33.401 67.056,34.036 R24.2
PWM5: J11.16 R21.1 | length 27.6
  TOP01 w0.152: J11.16 50.419,32.655 50.419,29.972 51.562,28.829 68.207,28.829 70.673,31.295 R21.1
RPWM1: J8.2 R2.1 U3.7 | length 37.6
  TOP01 w0.152: R2.1 57.139,45.285 60.717,45.285 U3.7
  BOTTOM04 w0.152: J8.2 59.309,64.135 59.309,45.847 59.03,45.568 58.909,45.568 58.553,45.212 v1(58.547,45.212)
RPWM2: J8.4 R1.1 U3.6 | length 37.1
  TOP01 w0.152: R1.1 57.084,47.671 58.147,46.609 v1(58.547,46.609) U3.6
  BOTTOM04 w0.152: J8.4 58.547,62.357 v1(58.547,46.609)
RX: J9.3 J11.11 | length 48
  TOP01 w0.152: J11.11 44.196,38.338 44.196,2.794 44.323,2.667 52.451,2.667 J9.3
SERVODUTY: J15.1 R19.1 U7.7 | length 81.5
  TOP01 w0.152: R19.1 57.084,31.53 57.685,32.131 v1(58.801,32.131) U7.7
  BOTTOM04 w0.152: J15.1 20.193,77.978 41.059,77.978 41.148,77.889 41.148,73.406 41.656,72.898 45.085,72.898 56.769,61.214 56.769,34.163 v1(58.801,32.131)
TX: J9.2 J11.9 | length 54.7
  TOP01 w0.152: J11.9 43.561,40.243 43.561,2.286 43.688,2.159 54.483,2.159 J9.2
V5: C10.2 C13.1 C14.2 L1.1 LM1.3 R1.2 R2.2 R8.2 R9.2 R16.2 R18.2 R19.2 U3.8 U6.8 U7.8 | length 73.3
  TOP01 w0.381: v1(49.784,66.04) 54.068,70.324 54.322,70.324 v1(54.356,70.358) ; R16.2 v1(54.356,70.358) ; R1.2 55.234,47.834 54.356,48.713 v1(54.356,70.358)
  BOTTOM04 w0.381: v1(19.05,38.735) 19.05,40.259 44.831,66.04 v1(49.784,66.04)
  other v1: 18.288,38.1 19.05,38.1 18.288,38.735
V6: C11.1 J15.2 R5.1 R6.1 R15.2 U4.4 | length 64.1
  TOP01 w0.381: J15.2 16.637,71.247 14.859,69.469 14.859,65.501 15.287,65.073 U4.4 ; C11.1 v1(24.257,60.198) ; v1(46.736,69.469) 48.768,69.469 v1(53.086,73.787) ; v1(58.039,70.498) R15.2
  BOTTOM04 w0.381: v1(24.13,65.151) 24.13,65.103 24.257,64.976 v1(24.257,60.198) 37.465,60.198 v1(46.736,69.469) ; v1(53.086,73.787) 54.75,73.787 v1(58.039,70.498)
  other v1: 21.971,65.151 22.733,65.151 23.368,65.151
VBAT: C7.1 D2.1 D3.1 S1.1
VBAT+: J2.1 S1.2
VCC3.3: C2.2 J3.1 J5.5 J9.1 J12.1 J16.4 R12.2 R17.2 R20.2 R22.2 R23.2 R25.1 R30.1 U1.5 | length 12.3
  TOP01 w0.381: C2.2 v1(27.722,21.626) ; v1(28.067,24.13) U1.5 ; v1(66.675,70.495) R12.2 ; v2(84.074,47.117) R23.2 ; v2(84.074,49.657) R22.2 ; v2(84.074,52.197) R20.2 ; v2(84.074,54.737) R17.2 ; v2(88.9,33.274) R25.1 ; v2(88.9,38.354) R30.1
  BOTTOM04 w0.381: v1(27.722,21.626) 27.722,21.674 28.067,22.019 v1(28.067,24.13)
VCC5: C4.2 C15.2 C16.1 C17.2 D1.1 D9.2 J4.4 J7.1 J7.2 J7.3 J7.4 J14.7 J14.8 LS1.1 R13.2 R26.1 R27.1 R28.1 R29.1 U2.8 U3.1 U3.4 U6.1 U6.4 U7.1 U7.4 | length 249.8
  TOP01 w0.381: J7.4 42.892,28.599 42.892,27.974 v1(42.926,27.94) ; v1(51.943,29.337) 64.262,29.337 64.578,29.653 v1(65.721,29.653) U7.1 65.679,30.766 64.484,30.766 64.008,31.242 64.008,34.311 64.231,34.534 U7.4 ; R13.2 v1(63.881,70.358) 63.881,68.707 ; U6.1 65.679,37.37 64.484,37.37 64.135,37.719 64.135,40.915 64.358,41.138 U6.4 ; U3.1 65.711,43.942 64.516,43.942 64.008,44.45 64.008,48.006 v1(65.721,49.719) ; U3.4 v1(65.721,49.719) ; D9.2 81.764,63.627 80.274,65.117 LS1.1 ; C17.2 86.923,60.356 87.146,60.579 89.789,60.579 91.186,59.182 94.742,59.182 96.266,60.706 96.266,67.437 92.329,71.374 82.179,71.374 80.274,69.469 LS1.1 ; 63.881,68.707 63.881,51.559 v1(65.721,49.719) ; 63.881,68.707 64.135,68.453 79.893,68.453 LS1.1
  BOTTOM04 w0.381: v1(28.575,30.988) 29.21,30.353 v1(29.21,17.145) ; v1(28.575,31.75) 32.893,31.75 v1(35.433,29.21) ; v1@42.989,27.877 43.561,28.448 49.403,28.448 50.292,29.337 v1(51.943,29.337) ; LS1.1 84.442,68.834 86.951,71.343 90.709,71.343 99.06,62.992 99.06,44.704 98.679,44.323 98.679,11.176 98.298,10.795 92.837,10.795 90.424,13.208 v1(80.772,13.208)
  other v1: 29.972,10.16 31.115,10.16 29.972,10.922 31.115,10.922 78.105,13.208 78.994,13.208 79.883,13.208 29.21,16.51 30.099,16.51 30.099,17.145 35.433,28.448 36.322,28.448 36.322,29.21 27.813,30.988 27.813,31.75 65.151,35.687 65.913,35.687 65.151,36.322 65.913,36.322 65.405,42.164 66.294,42.164 65.405,42.926 66.294,42.926
VCC-5: C5.2 C6.2 J7.9 J7.10 J7.11 J7.12 R14.2 U2.5 | length 85.2
  TOP01 w0.381: C6.2 v1(30.607,42.926) ; v1(55.626,60.071) 55.626,65.532 v1(59.055,68.961) ; v1(69.342,70.495) R14.2
  BOTTOM04 w0.381: J7.9 37.338,24.13 37.338,32.258 30.607,38.989 v1(30.607,42.926) 32.893,45.212 32.893,52.451 40.513,60.071 v1(55.626,60.071) ; v1(59.055,68.961) 67.808,68.961 v1(69.342,70.495)
pads on no net: J10.7 J10.8 J10.9 J10.10 J11.8 J11.10 J11.13 J11.14 J11.15 J11.17 J11.18 J11.19 J11.20 J12.11 J12.12 J12.13 J12.14 J12.15 J12.16 LM1.4 R24.1 S1.3 S3.3 U1.4 U2.7

## Polygon pours and split planes (outlines as drawn)
GND on TOP01 "GND_L01_P041" (solid, pour order 41): 0,80.001 100,80.001 100,80 100,0 0,0
NetJ4_1 on TOP01 "NETJ4_1_L01_P040" (solid, pour order 40): 14.351,13.335 14.351,8.382 17.145,8.382 17.272,8.509 17.272,13.335
GND on TOP01 "GND_L01_P039" (solid, pour order 39): 44.704,28.575 44.958,28.321 54.737,28.321 54.737,23.241 54.483,23.495 44.704,23.495
AGND on TOP01 "AGND_L01_P038" (solid, pour order 38): 38.227,28.321 42.037,28.321 42.545,27.813 42.545,24.003 38.227,24.003
NetR5_2 on TOP01 "NETR5_2_L01_P036" (solid, pour order 36): 16.383,67.691 16.51,67.564 16.51,66.04 21.717,66.04 22.352,66.675 22.352,67.691 27.432,67.691 27.94,68.199 27.813,68.326 27.813,69.723 16.383,69.723
no net on TOP01 "NONET_L01_P035" (solid, pour order 35): 16.51,62.357 16.51,58.928 19.431,58.928 19.558,58.801 19.558,62.357
NetC8_1 on TOP01 "NETC8_1_L01_P002" (solid, pour order 2): 18.288,48.768 18.288,46.228 18.542,45.974 18.669,46.101 28.067,46.101 28.067,48.514 27.813,48.768
VCC-5 on TOP01 "VCC-5_L01_P013" (solid, pour order 13): 35.814,21.844 35.814,20.574 37.719,18.669 40.64,18.669 41.148,18.161 41.148,13.716 43.561,13.716 43.053,14.224 43.053,23.495 38.481,23.495 37.592,22.606 37.592,21.844
GGND on TOP01 "GGND_L01_P034" (solid, pour order 34): 21.399,35.623 17.081,35.623 17.018,35.687 17.018,24.638 18.134,24.638 18.271,24.501 18.923,25.153 18.923,34.29 22.352,34.29 22.86,34.798 22.86,35.814
NetC1_2 on TOP01 "NETC1_2_L01_P033" (solid, pour order 33): 25.273,30.353 25.4,30.226 27.178,30.226 27.178,26.162 26.924,25.908 26.289,25.908 26.289,24.511 26.162,24.384 24.257,24.384 24.257,23.622 24.765,23.114 26.289,23.114 26.289,22.733 26.162,22.606 24.257,22.606 23.495,23.368 23.749,23.622 23.749,25.146 24.257,25.146 25.273,26.162
VCC5 on TOP01 "VCC5_L01_P032" (solid, pour order 32): 85.217,7.62 85.217,3.302 85.344,3.175 87.249,3.175 87.249,6.096 89.535,8.382 89.535,12.954 88.138,12.954 88.011,13.081 88.011,8.255 87.376,7.62
VCC5 on TOP01 "VCC5_L01_P031" (solid, pour order 31): 75.946,10.922 88.138,10.922 88.138,13.335 87.884,13.589 75.819,13.589
VCC5 on TOP01 "VCC5_L01_P030" (solid, pour order 30): 64.77,37.592 66.675,37.592 66.675,34.29 64.77,34.29
VCC5 on TOP01 "VCC5_L01_P029" (solid, pour order 29): 64.897,44.323 64.897,40.894 66.675,40.894 66.675,44.323
V5 on TOP01 "V5_L01_P028" (solid, pour order 28): 54.356,48.768 54.483,48.641 56.134,48.641 56.134,44.323 56.261,44.196 61.087,44.196 61.087,43.434 60.706,43.053 56.261,43.053 56.261,37.211 56.388,37.084 59.055,37.084 59.055,37.846 59.182,37.719 61.468,37.719 61.468,36.449 61.341,36.322 56.261,36.322 56.261,30.48 56.388,30.353 59.055,30.353 59.055,31.115 59.182,31.242 59.309,31.115 61.595,31.115 61.595,29.845 61.468,29.718 54.61,29.718
GND on TOP01 "GND_L01_P027" (solid, pour order 27): 62.611,78.359 70.485,78.359 70.485,76.708 62.611,76.708
GGND on TOP01 "GGND_L01_P026" (solid, pour order 26): 52.959,78.486 59.182,78.486 59.182,76.708 59.055,76.581 58.928,76.708 52.959,76.708
VCC5 on TOP01 "VCC5_L01_P025" (solid, pour order 25): 27.178,18.542 27.178,15.748 29.337,15.748 29.464,15.621 29.464,10.16 27.94,10.16 27.559,9.779 27.686,9.652 27.686,7.62 31.813,7.81 31.64,17.114
VCC5 on TOP01 "VCC5_L01_P024" (solid, pour order 24): 42.672,33.528 38.1,33.528 37.973,33.655 37.973,30.226 34.798,30.226 34.798,24.765 36.957,24.765 37.084,24.892 37.084,28.956 42.672,28.956
VCC5 on TOP01 "VCC5_L01_P023" (solid, pour order 23): 31.242,28.448 31.369,28.575 31.242,28.702 31.242,30.226 29.083,30.226 28.829,30.48 28.829,32.131 27.686,32.131 27.559,32.258 27.559,28.448
GGND on TOP01 "GGND_L01_P022" (solid, pour order 22): 12.7,52.832 12.827,52.705 15.113,52.705 15.113,57.404 14.986,57.531 12.7,57.531
V6 on TOP01 "V6_L01_P021" (solid, pour order 21): 18.034,65.659 22.606,65.659 23.114,66.167 23.114,67.31 25.019,67.31 25.273,67.056 25.273,63.119 23.622,63.119 22.352,64.389 18.034,64.389
GND on TOP01 "GND_L01_P020" (solid, pour order 20): 18.034,63.881 20.828,63.881 21.971,62.738 25.908,62.738 26.543,61.849 21.463,61.849 20.574,62.738 18.034,62.738
NetC12_1 on TOP01 "NETC12_1_L01_P018" (solid, pour order 18): 16.51,62.357 19.939,62.357 20.32,61.976 20.193,61.849 20.193,52.07 17.018,52.07 16.51,52.578
GND on TOP01 "GND_L01_P017" (solid, pour order 17): 24.511,52.578 26.67,52.578 26.797,52.451 30.861,56.515 30.861,66.802 30.099,67.564 25.781,67.564 25.781,63.119 25.527,62.865 26.543,61.849 28.194,61.849 28.194,58.166 26.035,56.007 24.511,56.007
GND on TOP01 "GND_L01_P016" (solid, pour order 16): 29.464,34.671 31.877,34.671 31.877,31.242 33.274,29.845 33.274,25.908 31.877,24.511 31.75,24.638 29.464,24.638 29.464,25.654 29.083,26.035 27.686,26.035 27.686,27.813 27.813,27.94 31.877,27.94 31.877,30.226 29.845,32.258 29.337,32.258
GND on TOP01 "GND_L01_P015" (solid, pour order 15): 25.527,24.257 27.178,24.257 27.178,21.717 26.924,21.717 26.67,21.463 26.67,19.685 25.202,19.685 24.892,19.995 24.892,21.844 25.908,21.844 26.543,22.479 26.543,23.368 25.527,23.368
GND on TOP01 "GND_L01_P014" (solid, pour order 14): 22.606,7.366 25.146,7.366 25.4,7.62 25.273,7.747 25.273,15.24 26.797,16.764 26.797,24.13 26.924,24.257 25.781,24.257 25.781,23.368 26.543,23.368 26.543,21.59 26.289,21.336 25.019,21.336 25.019,17.399 22.606,14.986
no net on TOP01 "NONET_L01_P012" (solid, pour order 12): 12.954,55.499 12.827,55.372 12.827,53.34
GGND on TOP01 "GGND_L01_P010" (solid, pour order 10): 1.651,27.305 10.541,27.305 10.668,27.178 12.317,8.218 16.51,7.112 17.745,7.314 17.653,7.405 17.653,9.779 20.701,9.779 20.574,9.652 20.574,4.953 10.16,4.953 9.017,6.096 9.017,10.541 3.302,10.541 1.397,12.446
GGND on TOP01 "GGND_L01_P009" (solid, pour order 9): 18.923,12.065 18.923,11.049 17.653,9.779 17.653,7.31 20.828,7.437 20.828,8.636 20.828,12.065
GGND on TOP01 "GGND_L01_P008" (solid, pour order 8): 23.749,20.32 23.749,18.034 22.098,16.383 22.098,12.065 18.923,12.065 18.923,14.097 20.32,14.097 21.088,14.865 21.088,20.113
GGND on TOP01 "GGND_L01_P007" (solid, pour order 7): 16.764,25.527 16.891,25.4 16.891,22.606 17.018,22.606 19.431,20.193 20.828,20.193 21.082,19.939 21.082,19.177 23.495,19.177 23.622,19.05 23.876,19.304 23.876,22.098 23.495,22.479 18.923,22.479 18.542,22.86 18.542,25.4
GGND on TOP01 "GGND_L01_P006" (solid, pour order 6): 26.035,45.847 27.432,45.847 27.686,45.593 27.432,45.339 27.432,34.925 21.717,34.925 21.209,35.433 21.59,35.814 21.59,43.18 21.717,43.053 23.876,43.053 23.876,37.338 23.749,37.211 24.511,36.449 26.035,36.449
V5 on TOP01 "V5_L01_P005" (solid, pour order 5): 21.082,39.243 14.732,39.243 13.97,38.481 13.97,14.605 20.574,14.605 20.955,14.986 20.574,15.367 20.574,19.558 18.542,19.558 16.383,21.717 16.383,35.941 17.145,36.703 21.082,36.703
GGND on TOP01 "GGND_L01_P004" (solid, pour order 4): 22.098,39.243 22.098,36.957 21.59,36.449 21.59,35.179 23.876,35.179 24.003,35.306 24.003,36.449 23.368,37.084 23.368,39.243
NetC8_1 on TOP01 "NETC8_1_L01_P003" (solid, pour order 3): 24.511,46.609 24.384,46.482 24.384,37.084 25.781,37.084 25.273,37.592 25.273,46.609
VBAT on TOP01 "VBAT_L01_P001" (solid, pour order 1): 5.588,55.88 7.62,55.88 8.509,54.991 8.509,52.929 17.587,47.733 18.161,43.561 17.272,41.148 17.018,41.402 15.494,41.402 11.557,45.339 11.557,50.419 9.652,50.038 5.461,51.054
VBAT+ on TOP01 "VBAT+_L01_P000" (solid, pour order 0): 5.948,49.276 10.618,49.276 10.222,39.178 9.525,38.481 6.355,38.481
GND on BOTTOM04 "GND_L04_P042" (solid, pour order 42): 0,80.001 100,80.001 100,80 100,0 0,0
GND on GND02 (split plane): 99.49,48.717 99.49,0.51 0.51,0.51 0.51,79.49 99.49,79.49
VCC3.3 on PWR03 (split plane): 99.49,48.717 99.49,0.51 0.51,0.51 0.51,79.49 99.49,79.49

## Silkscreen, mask and mechanical layers (free items; w line width, h text height)
Mechanical 1:
  lines w0.254: 0,0 100,0 100,48.717 100,80 3.669,80 0,80 0,0

## Dimensions
0,0 to 0,80 on Mechanical 1
0,0 to 100,0 on Mechanical 1

## Text inside footprints (layer, text, board x,y; h text height)
J6: Top Overlay "12" at 41.148,37.719 h1.27 r270; Top Overlay "1" at 38.608,36.703 h1.27 r270; Top Overlay "1" at 38.608,37.719 h1.27 r270; Top Overlay "1" at 38.608,54.991 h1.27 r270; Top Overlay "2" at 41.148,54.991 h1.27 r270
J7: Top Overlay "12" at 41.148,17.78 h1.27 r270; Top Overlay "1" at 38.608,16.764 h1.27 r270; Top Overlay "1" at 38.608,17.78 h1.27 r270; Top Overlay "1" at 38.608,35.052 h1.27 r270; Top Overlay "2" at 41.148,35.052 h1.27 r270
J8: Top Overlay "6" at 42.418,74.93 h1.27 r180; Top Overlay "5" at 42.418,77.47 h1.27 r180; Top Overlay "2" at 51.562,74.93 h1.27 r180; Top Overlay "1" at 51.054,77.47 h1.27 r180
J10: Top Overlay "1" at 76.716,25.146 h1.27 r180; Top Overlay "2" at 76.716,22.606 h1.27 r180
J11: Top Overlay "1" at 45.228,55.118 h1.27 r270; Top Overlay "2" at 47.768,55.118 h1.27 r270; Top Overlay "21" at 45.228,25.654 h1.27 r270; Top Overlay "22" at 47.768,25.654 h1.27 r270
J12: Top Overlay "1" at 76.708,55.118 h1.27 r270; Top Overlay "2" at 79.248,55.118 h1.27 r270; Top Overlay "21" at 76.708,25.654 h1.27 r270; Top Overlay "22" at 79.248,25.654 h1.27 r270
J14: Top Overlay "2" at 75.946,6.096 h1.27; Top Overlay "1" at 76.454,3.556 h1.27; Top Overlay "7" at 87.63,3.556 h1.27; Top Overlay "8" at 87.63,6.096 h1.27
LS1: Top Overlay "+" at 81.407,68.58 h0.76